# Altium PCB carrier_board.PcbDoc (part 8 of 18)
Units mm, origin at the board's own origin, x right, y up, seen from the top; angles counter-clockwise.
Board outline 146 x 102 mm, 20 copper layers (F.Cu, F.Mask, B.Cu, B.Mask, In1.Cu, F.SilkS, In2.Cu, B.SilkS, F.Adhes, B.Adhes, F.Paste, B.Paste, Dwgs.User, Cmts.User, Eco1.User, Eco2.User, Edge.Cuts, Margin, B.CrtYd, F.CrtYd); 256 components, 384 nets, 1262 pads, 1024 vias.
Unrouted connection lines stored in the file: 117.
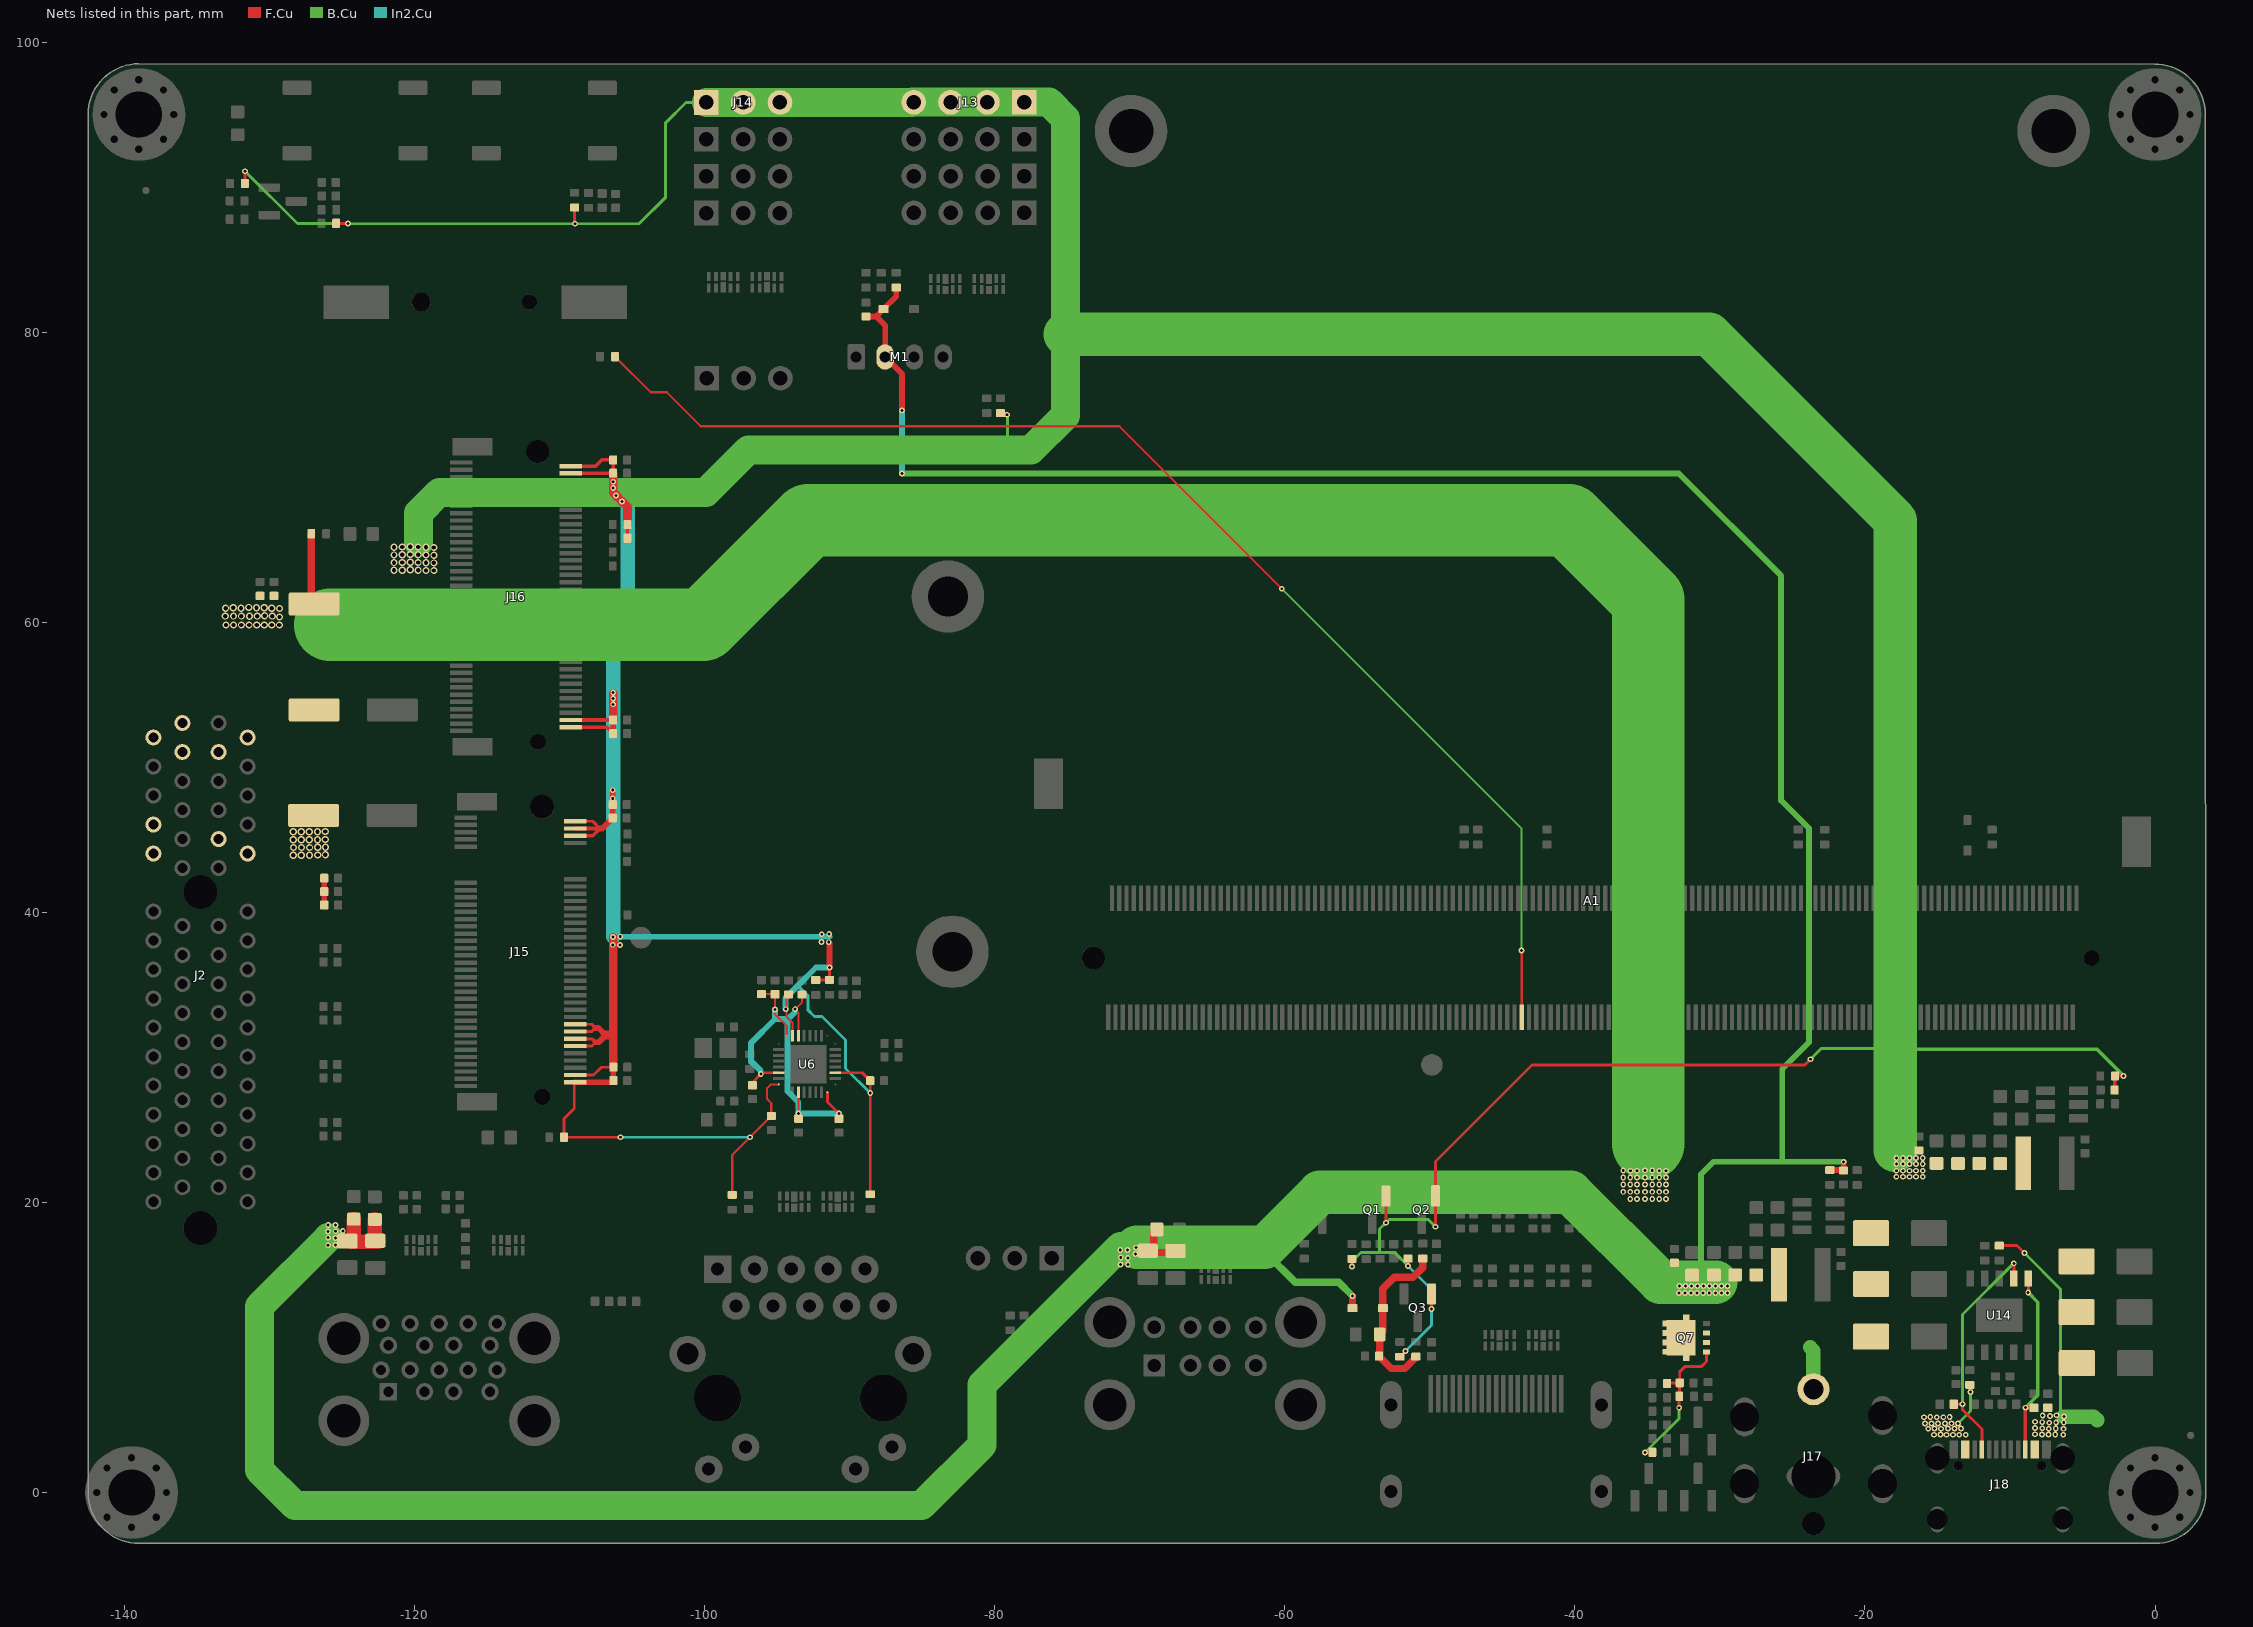
[diagram p18: the nets of this part, all layers, seen from the top]

## Via types
v1: diameter 0.4, hole 0.2, F.Cu to B.Cu, tented both sides, 956 vias
v2: diameter 0.5, hole 0.3, F.Cu to B.Cu, tented both sides, 68 vias

## Nets (pads, with @x,y where several pads share a name; then routed paths per layer and width w, separated by ;. In a path a pad name is that pad's centre, name@x,y a point inside that pad or via, vN(x,y) a via of type N, cw(c..) or ccw(c..) an arc to the next point about the centre after c; other vN are vias at no path point) (continued)
+12VA: (continued)
  other v1: -36.186,20.243 -35.726,20.243 -35.166,20.243 -34.666,20.243 -34.186,20.243 -33.726,20.243 -36.666,20.729 -36.186,20.729 -35.726,20.729 -35.166,20.729 -34.666,20.729 -34.186,20.729 -33.726,20.729 -36.666,21.235 -36.186,21.235 -35.726,21.235 -35.166,21.235 -34.666,21.235 -34.186,21.235 -33.726,21.235 -36.666,21.721 -36.186,21.721 -35.726,21.721 -35.166,21.721 -34.666,21.721 -34.186,21.721 -33.726,21.721 -36.176,22.186 -35.726,22.186 -34.186,22.186 -33.726,22.186 -36.666,22.206 -35.166,22.212 -34.666,22.206
  other v2: -132.99,59.81 -132.48,59.81 -131.93,59.81 -131.4,59.81 -130.88,59.81 -130.35,59.81 -129.83,59.81 -129.31,59.81 -129.3,60.36 -131.37,60.41 -133.04,60.42 -132.48,60.42 -131.93,60.42 -130.84,60.42 -130.33,60.44 -129.81,60.42 -133.02,60.97 -131.957,60.97 -129.831,60.97 -129.3,60.95 -132.489,60.99 -130.894,61 -130.363,60.99 -131.426,61.02
+15V: D12.1 D18.2 D19.2 D20.2 J18.A4 J18.A9 J18.B4 J18.B9 R36.1 R37.1 TP3.1 | length 19.7
  F.Cu w0.2: R37.1@-12.75,7.44 -12.75,6.97 v1(-12.72,6.94) ; R36.1@-10.74,17.02 -9.52,17.02 v1(-9.01,16.51)
  B.Cu w0.2: v1(-13.59,4.76) -12.72,5.63 v1(-12.72,6.94) ; v1(-9.01,16.51) -6.534,14.034 -6.534,5.586 v1(-6.79,5.33)
  B.Cu w1: v1(-6.29,5.24) -4.24,5.24 TP3.1@-4,5
  other v1: -15.24,3.98 -14.8,3.99 -14.37,3.98 -13.94,3.98 -13.5,3.98 -13.05,3.98 -7.35,3.99 -6.88,3.99 -6.33,3.98 -8.28,4.02 -7.79,4.01 -15.64,4.4 -14.75,4.4 -7.33,4.4 -6.32,4.39 -15.2,4.41 -14.27,4.41 -13.83,4.42 -13.38,4.41 -7.78,4.43 -6.85,4.41 -8.275,4.441 -15.86,4.75 -15.42,4.76 -14.97,4.75 -14.48,4.76 -14.04,4.77 -7.3,4.81 -6.82,4.83 -6.3,4.82 -7.78,4.85 -8.28,4.88 -15.94,5.19 -15.05,5.19 -14.6,5.19 -15.5,5.2 -14.16,5.2 -7.25,5.28 -7.75,5.3
+BATT: A1.115 R1.1 | length 89
  F.Cu w0.15: R1.1@-106.18,78.31 -103.72,75.85 -102.61,75.85 -100.27,73.51 -71.41,73.51 v1(-60.21,62.31) ; v1(-43.67,37.36) -43.665,37.355 A1.115@-43.665,32.76
  B.Cu w0.15: v1(-60.21,62.31) -43.67,45.77 v1(-43.67,37.36)
CC1: D13.1 J18.A5 U14.7 | length 16.5
  F.Cu w0.2: D13.1@-13.885,6.09 v1(-13.27,6.09) -13.27,5.7 -11.94,4.37 J18.A5@-11.94,2.955 ; U14.7@-9.74,14.77 v1(-9.74,15.8)
  B.Cu w0.2: v1(-13.27,6.09) -13.27,12.27 v1(-9.74,15.8)
CC2: D14.1 J18.B5 U14.6 | length 13
  F.Cu w0.2: v1(-8.75,13.79) -8.74,13.8 U14.6@-8.74,14.77
  F.Cu w0.25: J18.B5@-8.94,2.955 -8.94,5.84 v1(-8.93,5.85) -8.91,5.83 D14.1@-8.345,5.83
  B.Cu w0.25: v1(-8.93,5.85) -8.08,6.7 -8.08,13.12 v1(-8.75,13.79)